# Altium PCB layout.PcbDoc (part 4 of 11)
Units mil, origin at the board's own origin, x right, y up, seen from the top; angles counter-clockwise.
Board outline 3543.31 x 3149.61 mil, 2 copper layers (Top Layer, Bottom Layer); 78 components, 73 nets, 327 pads, 143 vias.
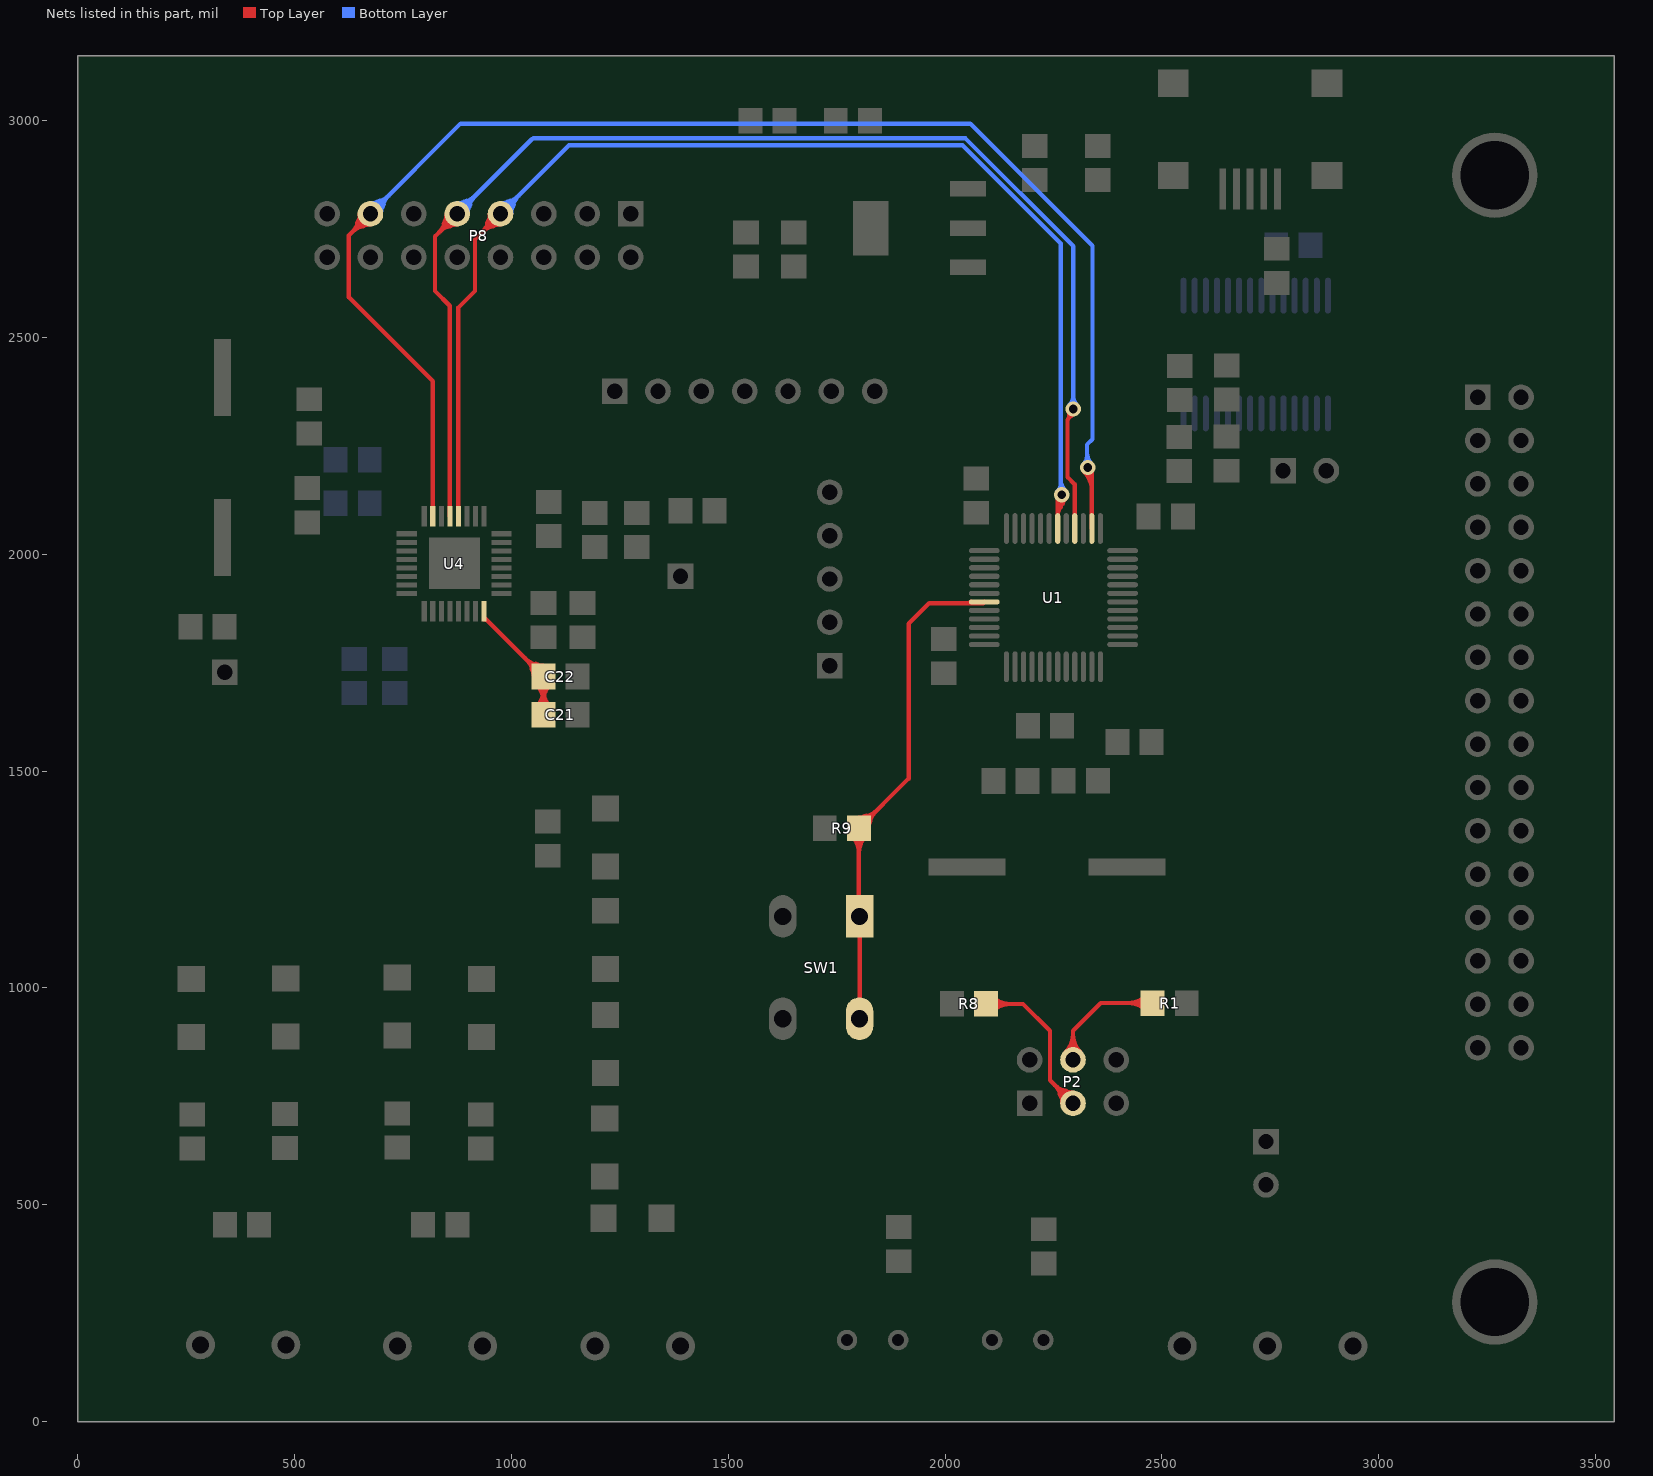
[diagram p4: the nets of this part, all layers, seen from the top]

## Via types
v1: diameter 35, hole 20, Top Layer to Bottom Layer, tented both sides, 113 vias
v2: diameter 35, hole 20, Top Layer to Bottom Layer, 28 vias
v3: diameter 35.43, hole 35.43, Top Layer to Bottom Layer, 2 vias

## Nets (pads, with @x,y where several pads share a name; then routed paths per layer and width w, separated by ;. In a path a pad name is that pad's centre, name@x,y a point inside that pad or via, vN(x,y) a via of type N, cw(c..) or ccw(c..) an arc to the next point about the centre after c; other vN are vias at no path point) (continued)
9153_MOSI: P8.9 U1.28 U4.29 | length 6515.8
  Top Layer w10: U4.29@858.13,2087.57 858.13,2572.87 824,2607 824,2733 875,2784 P8.9@875,2785 ; U1.28@2299.21,2059.45 2299.21,2161.16 2282.5,2177.87 2282.5,2310.5 ; v2@2303,2342.5 v2(2295.5,2335) 2295.5,2323.5 2282.5,2310.5 ; 832.42,2741.42 ccw(c788.84,2785) P8.9@850.47,2785 ; 832.42,2741.42 ccw(c788.84,2785) P8.9@850.47,2785 ; 832.42,2741.42 ccw(c788.84,2785) P8.9@850.47,2785 ; 832.42,2741.42 ccw(c788.84,2785) P8.9@850.47,2785 ; 832.42,2741.42 ccw(c788.84,2785) P8.9@850.47,2785 ; 834.84,2743.84 cw(c875,2703.67) P8.9@875,2760.47 ; 834.84,2743.84 cw(c875,2703.67) P8.9@875,2760.47 ; 834.84,2743.84 cw(c875,2703.67) P8.9@875,2760.47 ; 834.84,2743.84 cw(c875,2703.67) P8.9@875,2760.47 ; 834.84,2743.84 cw(c875,2703.67) P8.9@875,2760.47 ; 844.36,2762.2 cw(c882.24,2752.05) P8.9@873.83,2790.35 ; 844.36,2762.2 cw(c882.24,2752.05) P8.9@873.83,2790.35 ; 844.36,2762.2 cw(c882.24,2752.05) P8.9@873.83,2790.35 ; 844.36,2762.2 cw(c882.24,2752.05) P8.9@873.83,2790.35 ; 844.36,2762.2 cw(c882.24,2752.05) P8.9@873.83,2790.35 ; 844.36,2762.2 cw(c882.24,2752.05) P8.9@873.83,2790.35 ; 844.36,2762.2 cw(c882.24,2752.05) P8.9@873.83,2790.35 ; 844.36,2762.2 cw(c882.24,2752.05) P8.9@873.83,2790.35 ; 844.36,2762.2 cw(c882.24,2752.05) P8.9@873.83,2790.35 ; 844.36,2762.2 cw(c882.24,2752.05) P8.9@873.83,2790.35 ; 849.49,2758.49 ccw(c822.99,2785) P8.9@860.47,2785 ; 849.49,2758.49 ccw(c822.99,2785) P8.9@860.47,2785 ; 849.49,2758.49 ccw(c822.99,2785) P8.9@860.47,2785 ; 849.49,2758.49 ccw(c822.99,2785) P8.9@860.47,2785 ; 849.49,2758.49 ccw(c822.99,2785) P8.9@860.47,2785 ; 851.91,2760.91 cw(c875,2737.81) P8.9@875,2770.47 ; 851.91,2760.91 cw(c875,2737.81) P8.9@875,2770.47 ; 851.91,2760.91 cw(c875,2737.81) P8.9@875,2770.47 ; 851.91,2760.91 cw(c875,2737.81) P8.9@875,2770.47 ; 851.91,2760.91 cw(c875,2737.81) P8.9@875,2770.47 ; 853.11,2754.61 ccw(c843.36,2791) P8.9@880.38,2783.98 ; 853.11,2754.61 ccw(c843.36,2791) P8.9@880.38,2783.98 ; 853.11,2754.61 ccw(c843.36,2791) P8.9@880.38,2783.98 ; 853.11,2754.61 ccw(c843.36,2791) P8.9@880.38,2783.98 ; 853.11,2754.61 ccw(c843.36,2791) P8.9@880.38,2783.98 ; 853.11,2754.61 ccw(c843.36,2791) P8.9@880.38,2783.98 ; 853.11,2754.61 ccw(c843.36,2791) P8.9@880.38,2783.98 ; 853.11,2754.61 ccw(c843.36,2791) P8.9@880.38,2783.98 ; 853.11,2754.61 ccw(c843.36,2791) P8.9@880.38,2783.98 ; 853.11,2754.61 ccw(c843.36,2791) P8.9@880.38,2783.98 ; 2282.5,2310.5 ccw(c2272,2321) v2@2284.76,2328.6 ; 2282.5,2310.5 ccw(c2272,2321) v2@2284.76,2328.6 ; 2282.5,2310.5 ccw(c2272,2321) v2@2284.76,2328.6 ; 2282.5,2310.5 ccw(c2272,2321) v2@2284.76,2328.6 ; 2282.5,2310.5 ccw(c2272,2321) v2@2284.76,2328.6
  Bottom Layer w10: P8.9@875,2785 1047,2957 ; 1051,2959 2047.12,2959 2295.5,2710.62 v2(2295.5,2335) ; P8.9@869.64,2786.1 cw(c907.3,2778.39) 897.35,2815.52 ; P8.9@869.64,2786.1 cw(c907.3,2778.39) 897.35,2815.52 ; P8.9@869.64,2786.1 cw(c907.3,2778.39) 897.35,2815.52 ; P8.9@869.64,2786.1 cw(c907.3,2778.39) 897.35,2815.52 ; P8.9@869.64,2786.1 cw(c907.3,2778.39) 897.35,2815.52 ; P8.9@869.64,2786.1 cw(c907.3,2778.39) 897.35,2815.52 ; P8.9@869.64,2786.1 cw(c907.3,2778.39) 897.35,2815.52 ; P8.9@869.64,2786.1 cw(c907.3,2778.39) 897.35,2815.52 ; P8.9@869.64,2786.1 cw(c907.3,2778.39) 897.35,2815.52 ; P8.9@869.64,2786.1 cw(c907.3,2778.39) 897.35,2815.52 ; P8.9@875,2799.53 ccw(c875,2834.6) 899.8,2809.8 ; P8.9@875,2799.53 ccw(c875,2834.6) 899.8,2809.8 ; P8.9@875,2799.53 ccw(c875,2834.6) 899.8,2809.8 ; P8.9@875,2799.53 ccw(c875,2834.6) 899.8,2809.8 ; P8.9@875,2799.53 ccw(c875,2834.6) 899.8,2809.8 ; P8.9@875,2809.53 ccw(c875,2868.74) 916.87,2826.87 ; P8.9@875,2809.53 ccw(c875,2868.74) 916.87,2826.87 ; P8.9@875,2809.53 ccw(c875,2868.74) 916.87,2826.87 ; P8.9@875,2809.53 ccw(c875,2868.74) 916.87,2826.87 ; P8.9@875,2809.53 ccw(c875,2868.74) 916.87,2826.87 ; P8.9@876.1,2779.64 ccw(c868.39,2817.3) 905.52,2807.35 ; P8.9@876.1,2779.64 ccw(c868.39,2817.3) 905.52,2807.35 ; P8.9@876.1,2779.64 ccw(c868.39,2817.3) 905.52,2807.35 ; P8.9@876.1,2779.64 ccw(c868.39,2817.3) 905.52,2807.35 ; P8.9@876.1,2779.64 ccw(c868.39,2817.3) 905.52,2807.35 ; P8.9@876.1,2779.64 ccw(c868.39,2817.3) 905.52,2807.35 ; P8.9@876.1,2779.64 ccw(c868.39,2817.3) 905.52,2807.35 ; P8.9@876.1,2779.64 ccw(c868.39,2817.3) 905.52,2807.35 ; P8.9@876.1,2779.64 ccw(c868.39,2817.3) 905.52,2807.35 ; P8.9@876.1,2779.64 ccw(c868.39,2817.3) 905.52,2807.35 ; P8.9@889.53,2785 cw(c924.6,2785) 899.8,2809.8 ; P8.9@889.53,2785 cw(c924.6,2785) 899.8,2809.8 ; P8.9@889.53,2785 cw(c924.6,2785) 899.8,2809.8 ; P8.9@889.53,2785 cw(c924.6,2785) 899.8,2809.8 ; P8.9@889.53,2785 cw(c924.6,2785) 899.8,2809.8 ; P8.9@899.53,2785 cw(c958.74,2785) 916.87,2826.87 ; P8.9@899.53,2785 cw(c958.74,2785) 916.87,2826.87 ; P8.9@899.53,2785 cw(c958.74,2785) 916.87,2826.87 ; P8.9@899.53,2785 cw(c958.74,2785) 916.87,2826.87 ; P8.9@899.53,2785 cw(c958.74,2785) 916.87,2826.87 ; v2@2286.66,2343.84 ccw(c2265.32,2365.18) 2295.5,2365.18 ; v2@2286.66,2343.84 ccw(c2265.32,2365.18) 2295.5,2365.18 ; v2@2286.66,2343.84 ccw(c2265.32,2365.18) 2295.5,2365.18 ; v2@2286.66,2343.84 ccw(c2265.32,2365.18) 2295.5,2365.18 ; v2@2286.66,2343.84 ccw(c2265.32,2365.18) 2295.5,2365.18 ; 2295.5,2365.18 ccw(c2325.68,2365.18) v2@2304.34,2343.84 ; 2295.5,2365.18 ccw(c2325.68,2365.18) v2@2304.34,2343.84 ; 2295.5,2365.18 ccw(c2325.68,2365.18) v2@2304.34,2343.84 ; 2295.5,2365.18 ccw(c2325.68,2365.18) v2@2304.34,2343.84 ; 2295.5,2365.18 ccw(c2325.68,2365.18) v2@2304.34,2343.84
9153_RSTB: P8.7 U1.30 U4.28 | length 7275.5
  Top Layer w10: U4.28@877.82,2087.57 877.82,2568.82 916,2607 916,2726 P8.7@975,2785 ; U1.30@2259.84,2059.45 2259.84,2127.84 v2(2269,2137) ; 933.13,2743.13 cw(c975,2701.26) P8.7@975,2760.47 ; 933.13,2743.13 ccw(c891.26,2785) P8.7@950.47,2785 ; 933.13,2743.13 cw(c975,2701.26) P8.7@975,2760.47 ; 933.13,2743.13 ccw(c891.26,2785) P8.7@950.47,2785 ; 933.13,2743.13 cw(c975,2701.26) P8.7@975,2760.47 ; 933.13,2743.13 ccw(c891.26,2785) P8.7@950.47,2785 ; 933.13,2743.13 cw(c975,2701.26) P8.7@975,2760.47 ; 933.13,2743.13 ccw(c891.26,2785) P8.7@950.47,2785 ; 933.13,2743.13 cw(c975,2701.26) P8.7@975,2760.47 ; 933.13,2743.13 ccw(c891.26,2785) P8.7@950.47,2785 ; 944.48,2762.65 cw(c981.61,2752.7) P8.7@973.9,2790.36 ; 944.48,2762.65 cw(c981.61,2752.7) P8.7@973.9,2790.36 ; 944.48,2762.65 cw(c981.61,2752.7) P8.7@973.9,2790.36 ; 944.48,2762.65 cw(c981.61,2752.7) P8.7@973.9,2790.36 ; 944.48,2762.65 cw(c981.61,2752.7) P8.7@973.9,2790.36 ; 944.48,2762.65 cw(c981.61,2752.7) P8.7@973.9,2790.36 ; 944.48,2762.65 cw(c981.61,2752.7) P8.7@973.9,2790.36 ; 944.48,2762.65 cw(c981.61,2752.7) P8.7@973.9,2790.36 ; 944.48,2762.65 cw(c981.61,2752.7) P8.7@973.9,2790.36 ; 944.48,2762.65 cw(c981.61,2752.7) P8.7@973.9,2790.36 ; 950.2,2760.2 cw(c975,2735.4) P8.7@975,2770.47 ; 950.2,2760.2 ccw(c925.4,2785) P8.7@960.47,2785 ; 950.2,2760.2 cw(c975,2735.4) P8.7@975,2770.47 ; 950.2,2760.2 ccw(c925.4,2785) P8.7@960.47,2785 ; 950.2,2760.2 cw(c975,2735.4) P8.7@975,2770.47 ; 950.2,2760.2 ccw(c925.4,2785) P8.7@960.47,2785 ; 950.2,2760.2 cw(c975,2735.4) P8.7@975,2770.47 ; 950.2,2760.2 ccw(c925.4,2785) P8.7@960.47,2785 ; 950.2,2760.2 cw(c975,2735.4) P8.7@975,2770.47 ; 950.2,2760.2 ccw(c925.4,2785) P8.7@960.47,2785 ; 952.65,2754.48 ccw(c942.7,2791.61) P8.7@980.36,2783.9 ; 952.65,2754.48 ccw(c942.7,2791.61) P8.7@980.36,2783.9 ; 952.65,2754.48 ccw(c942.7,2791.61) P8.7@980.36,2783.9 ; 952.65,2754.48 ccw(c942.7,2791.61) P8.7@980.36,2783.9 ; 952.65,2754.48 ccw(c942.7,2791.61) P8.7@980.36,2783.9 ; 952.65,2754.48 ccw(c942.7,2791.61) P8.7@980.36,2783.9 ; 952.65,2754.48 ccw(c942.7,2791.61) P8.7@980.36,2783.9 ; 952.65,2754.48 ccw(c942.7,2791.61) P8.7@980.36,2783.9 ; 952.65,2754.48 ccw(c942.7,2791.61) P8.7@980.36,2783.9 ; 952.65,2754.48 ccw(c942.7,2791.61) P8.7@980.36,2783.9 ; U1.30@2259.84,2084.71 cw(c2321.29,2084.71) v2@2277.84,2128.16 ; U1.30@2259.84,2084.71 cw(c2321.29,2084.71) v2@2277.84,2128.16 ; U1.30@2259.84,2084.71 cw(c2321.29,2084.71) v2@2277.84,2128.16 ; U1.30@2259.84,2084.71 cw(c2321.29,2084.71) v2@2277.84,2128.16 ; U1.30@2259.84,2084.71 cw(c2321.29,2084.71) v2@2277.84,2128.16 ; 2259.84,2108.86 cw(c2297.14,2108.86) v2@2270.77,2135.23 ; 2259.84,2108.86 cw(c2297.14,2108.86) v2@2270.77,2135.23 ; 2259.84,2108.86 cw(c2297.14,2108.86) v2@2270.77,2135.23 ; 2259.84,2108.86 cw(c2297.14,2108.86) v2@2270.77,2135.23 ; 2259.84,2108.86 cw(c2297.14,2108.86) v2@2270.77,2135.23 ; v2@2260.57,2127.77 cw(c2256.17,2122.97) 2261.81,2119.72 ; v2@2260.57,2127.77 cw(c2256.17,2122.97) 2261.81,2119.72 ; v2@2260.57,2127.77 cw(c2256.17,2122.97) 2261.81,2119.72 ; v2@2260.57,2127.77 cw(c2256.17,2122.97) 2261.81,2119.72 ; v2@2260.57,2127.77 cw(c2256.17,2122.97) 2261.81,2119.72 ; v2@2260.57,2127.77 cw(c2256.17,2122.97) 2261.81,2119.72 ; v2@2260.57,2127.77 cw(c2256.17,2122.97) 2261.81,2119.72 ; v2@2260.57,2127.77 cw(c2256.17,2122.97) 2261.81,2119.72 ; v2@2260.57,2127.77 cw(c2256.17,2122.97) 2261.81,2119.72 ; v2@2260.57,2127.77 cw(c2256.17,2122.97) 2261.81,2119.72 ; v2@2261.37,2127.1 cw(c2251.72,2114.56) 2265.42,2106.65 ; v2@2261.37,2127.1 cw(c2251.72,2114.56) 2265.42,2106.65 ; v2@2261.37,2127.1 cw(c2251.72,2114.56) 2265.42,2106.65 ; v2@2261.37,2127.1 cw(c2251.72,2114.56) 2265.42,2106.65 ; v2@2261.37,2127.1 cw(c2251.72,2114.56) 2265.42,2106.65 ; v2@2261.37,2127.1 cw(c2251.72,2114.56) 2265.42,2106.65 ; v2@2261.37,2127.1 cw(c2251.72,2114.56) 2265.42,2106.65 ; v2@2261.37,2127.1 cw(c2251.72,2114.56) 2265.42,2106.65 ; v2@2261.37,2127.1 cw(c2251.72,2114.56) 2265.42,2106.65 ; v2@2261.37,2127.1 cw(c2251.72,2114.56) 2265.42,2106.65 ; 2261.81,2119.72 cw(c2270.14,2114.91) v2@2269.65,2124.52 ; 2261.81,2119.72 cw(c2270.14,2114.91) v2@2269.65,2124.52 ; 2261.81,2119.72 cw(c2270.14,2114.91) v2@2269.65,2124.52 ; 2261.81,2119.72 cw(c2270.14,2114.91) v2@2269.65,2124.52 ; 2261.81,2119.72 cw(c2270.14,2114.91) v2@2269.65,2124.52 ; 2261.81,2119.72 cw(c2270.14,2114.91) v2@2269.65,2124.52 ; 2261.81,2119.72 cw(c2270.14,2114.91) v2@2269.65,2124.52 ; 2261.81,2119.72 cw(c2270.14,2114.91) v2@2269.65,2124.52 ; 2261.81,2119.72 cw(c2270.14,2114.91) v2@2269.65,2124.52 ; 2261.81,2119.72 cw(c2270.14,2114.91) v2@2269.65,2124.52 ; v2@2267.47,2135.02 cw(c2258.75,2123.69) 2271.13,2116.55 ; v2@2267.47,2135.02 cw(c2258.75,2123.69) 2271.13,2116.55 ; v2@2267.47,2135.02 cw(c2258.75,2123.69) 2271.13,2116.55 ; v2@2267.47,2135.02 cw(c2258.75,2123.69) 2271.13,2116.55 ; v2@2267.47,2135.02 cw(c2258.75,2123.69) 2271.13,2116.55 ; v2@2267.47,2135.02 cw(c2258.75,2123.69) 2271.13,2116.55 ; v2@2267.47,2135.02 cw(c2258.75,2123.69) 2271.13,2116.55 ; v2@2267.47,2135.02 cw(c2258.75,2123.69) 2271.13,2116.55 ; v2@2267.47,2135.02 cw(c2258.75,2123.69) 2271.13,2116.55 ; v2@2267.47,2135.02 cw(c2258.75,2123.69) 2271.13,2116.55
  Bottom Layer w10: P8.7@975,2785 1133,2943 2040.49,2943 2267,2716.49 2267,2139 v2(2269,2137) ; P8.7@969.64,2786.1 cw(c1007.3,2778.39) 997.35,2815.52 ; P8.7@969.64,2786.1 cw(c1007.3,2778.39) 997.35,2815.52 ; P8.7@969.64,2786.1 cw(c1007.3,2778.39) 997.35,2815.52 ; P8.7@969.64,2786.1 cw(c1007.3,2778.39) 997.35,2815.52 ; P8.7@969.64,2786.1 cw(c1007.3,2778.39) 997.35,2815.52 ; P8.7@969.64,2786.1 cw(c1007.3,2778.39) 997.35,2815.52 ; P8.7@969.64,2786.1 cw(c1007.3,2778.39) 997.35,2815.52 ; P8.7@969.64,2786.1 cw(c1007.3,2778.39) 997.35,2815.52 ; P8.7@969.64,2786.1 cw(c1007.3,2778.39) 997.35,2815.52 ; P8.7@969.64,2786.1 cw(c1007.3,2778.39) 997.35,2815.52 ; P8.7@975,2799.53 ccw(c975,2834.6) 999.8,2809.8 ; P8.7@975,2799.53 ccw(c975,2834.6) 999.8,2809.8 ; P8.7@975,2799.53 ccw(c975,2834.6) 999.8,2809.8 ; P8.7@975,2799.53 ccw(c975,2834.6) 999.8,2809.8 ; P8.7@975,2799.53 ccw(c975,2834.6) 999.8,2809.8 ; P8.7@975,2809.53 ccw(c975,2868.74) 1016.87,2826.87 ; P8.7@975,2809.53 ccw(c975,2868.74) 1016.87,2826.87 ; P8.7@975,2809.53 ccw(c975,2868.74) 1016.87,2826.87 ; P8.7@975,2809.53 ccw(c975,2868.74) 1016.87,2826.87 ; P8.7@975,2809.53 ccw(c975,2868.74) 1016.87,2826.87 ; P8.7@976.1,2779.64 ccw(c968.39,2817.3) 1005.52,2807.35 ; P8.7@976.1,2779.64 ccw(c968.39,2817.3) 1005.52,2807.35 ; P8.7@976.1,2779.64 ccw(c968.39,2817.3) 1005.52,2807.35 ; P8.7@976.1,2779.64 ccw(c968.39,2817.3) 1005.52,2807.35 ; P8.7@976.1,2779.64 ccw(c968.39,2817.3) 1005.52,2807.35 ; P8.7@976.1,2779.64 ccw(c968.39,2817.3) 1005.52,2807.35 ; P8.7@976.1,2779.64 ccw(c968.39,2817.3) 1005.52,2807.35 ; P8.7@976.1,2779.64 ccw(c968.39,2817.3) 1005.52,2807.35 ; P8.7@976.1,2779.64 ccw(c968.39,2817.3) 1005.52,2807.35 ; P8.7@976.1,2779.64 ccw(c968.39,2817.3) 1005.52,2807.35 ; P8.7@989.53,2785 cw(c1024.6,2785) 999.8,2809.8 ; P8.7@989.53,2785 cw(c1024.6,2785) 999.8,2809.8 ; P8.7@989.53,2785 cw(c1024.6,2785) 999.8,2809.8 ; P8.7@989.53,2785 cw(c1024.6,2785) 999.8,2809.8 ; P8.7@989.53,2785 cw(c1024.6,2785) 999.8,2809.8 ; P8.7@999.53,2785 cw(c1058.74,2785) 1016.87,2826.87 ; P8.7@999.53,2785 cw(c1058.74,2785) 1016.87,2826.87 ; P8.7@999.53,2785 cw(c1058.74,2785) 1016.87,2826.87 ; P8.7@999.53,2785 cw(c1058.74,2785) 1016.87,2826.87 ; P8.7@999.53,2785 cw(c1058.74,2785) 1016.87,2826.87 ; v2@2260.16,2145.84 ccw(c2243.65,2162.35) 2267,2162.35 ; v2@2260.16,2145.84 ccw(c2243.65,2162.35) 2267,2162.35 ; v2@2260.16,2145.84 ccw(c2243.65,2162.35) 2267,2162.35 ; v2@2260.16,2145.84 ccw(c2243.65,2162.35) 2267,2162.35 ; v2@2260.16,2145.84 ccw(c2243.65,2162.35) 2267,2162.35 ; 2267,2172.01 ccw(c2304.01,2172.01) v2@2277.84,2145.84 ; 2267,2172.01 ccw(c2304.01,2172.01) v2@2277.84,2145.84 ; 2267,2172.01 ccw(c2304.01,2172.01) v2@2277.84,2145.84 ; 2267,2172.01 ccw(c2304.01,2172.01) v2@2277.84,2145.84 ; 2267,2172.01 ccw(c2304.01,2172.01) v2@2277.84,2145.84
9153_SCLK: P8.13 U1.26 U4.31 | length 7351.5
  Top Layer w10: P8.13@675,2785 625,2735 625,2593 818.76,2399.24 U4.31@818.76,2087.57 ; v2(2329,2200) 2338.58,2190.42 U1.26@2338.58,2059.45 ; 633.13,2743.13 cw(c675,2701.26) P8.13@675,2760.47 ; 633.13,2743.13 ccw(c591.26,2785) P8.13@650.47,2785 ; 633.13,2743.13 cw(c675,2701.26) P8.13@675,2760.47 ; 633.13,2743.13 ccw(c591.26,2785) P8.13@650.47,2785 ; 633.13,2743.13 cw(c675,2701.26) P8.13@675,2760.47 ; 633.13,2743.13 ccw(c591.26,2785) P8.13@650.47,2785 ; 633.13,2743.13 cw(c675,2701.26) P8.13@675,2760.47 ; 633.13,2743.13 ccw(c591.26,2785) P8.13@650.47,2785 ; 633.13,2743.13 cw(c675,2701.26) P8.13@675,2760.47 ; 633.13,2743.13 ccw(c591.26,2785) P8.13@650.47,2785 ; 644.48,2762.65 cw(c681.61,2752.7) P8.13@673.9,2790.36 ; 644.48,2762.65 cw(c681.61,2752.7) P8.13@673.9,2790.36 ; 644.48,2762.65 cw(c681.61,2752.7) P8.13@673.9,2790.36 ; 644.48,2762.65 cw(c681.61,2752.7) P8.13@673.9,2790.36 ; 644.48,2762.65 cw(c681.61,2752.7) P8.13@673.9,2790.36 ; 644.48,2762.65 cw(c681.61,2752.7) P8.13@673.9,2790.36 ; 644.48,2762.65 cw(c681.61,2752.7) P8.13@673.9,2790.36 ; 644.48,2762.65 cw(c681.61,2752.7) P8.13@673.9,2790.36 ; 644.48,2762.65 cw(c681.61,2752.7) P8.13@673.9,2790.36 ; 644.48,2762.65 cw(c681.61,2752.7) P8.13@673.9,2790.36 ; 650.2,2760.2 cw(c675,2735.4) P8.13@675,2770.47 ; 650.2,2760.2 ccw(c625.4,2785) P8.13@660.47,2785 ; 650.2,2760.2 cw(c675,2735.4) P8.13@675,2770.47 ; 650.2,2760.2 ccw(c625.4,2785) P8.13@660.47,2785 ; 650.2,2760.2 cw(c675,2735.4) P8.13@675,2770.47 ; 650.2,2760.2 ccw(c625.4,2785) P8.13@660.47,2785 ; 650.2,2760.2 cw(c675,2735.4) P8.13@675,2770.47 ; 650.2,2760.2 ccw(c625.4,2785) P8.13@660.47,2785 ; 650.2,2760.2 cw(c675,2735.4) P8.13@675,2770.47 ; 650.2,2760.2 ccw(c625.4,2785) P8.13@660.47,2785 ; 652.65,2754.48 ccw(c642.7,2791.61) P8.13@680.36,2783.9 ; 652.65,2754.48 ccw(c642.7,2791.61) P8.13@680.36,2783.9 ; 652.65,2754.48 ccw(c642.7,2791.61) P8.13@680.36,2783.9 ; 652.65,2754.48 ccw(c642.7,2791.61) P8.13@680.36,2783.9 ; 652.65,2754.48 ccw(c642.7,2791.61) P8.13@680.36,2783.9 ; 652.65,2754.48 ccw(c642.7,2791.61) P8.13@680.36,2783.9 ; 652.65,2754.48 ccw(c642.7,2791.61) P8.13@680.36,2783.9 ; 652.65,2754.48 ccw(c642.7,2791.61) P8.13@680.36,2783.9 ; 652.65,2754.48 ccw(c642.7,2791.61) P8.13@680.36,2783.9 ; 652.65,2754.48 ccw(c642.7,2791.61) P8.13@680.36,2783.9 ; v2@2320.16,2191.16 cw(c2275.69,2146.69) 2338.58,2146.69 ; v2@2320.16,2191.16 cw(c2275.69,2146.69) 2338.58,2146.69 ; v2@2320.16,2191.16 cw(c2275.69,2146.69) 2338.58,2146.69 ; v2@2320.16,2191.16 cw(c2275.69,2146.69) 2338.58,2146.69 ; v2@2320.16,2191.16 cw(c2275.69,2146.69) 2338.58,2146.69 ; v2@2327.23,2198.23 cw(c2299.83,2170.83) 2338.58,2170.83 ; v2@2327.23,2198.23 cw(c2299.83,2170.83) 2338.58,2170.83 ; v2@2327.23,2198.23 cw(c2299.83,2170.83) 2338.58,2170.83 ; v2@2327.23,2198.23 cw(c2299.83,2170.83) 2338.58,2170.83 ; v2@2327.23,2198.23 cw(c2299.83,2170.83) 2338.58,2170.83 ; v2@2327.94,2187.54 cw(c2327.01,2176.55) 2336.56,2182.07 ; v2@2327.94,2187.54 cw(c2327.01,2176.55) 2336.56,2182.07 ; v2@2327.94,2187.54 cw(c2327.01,2176.55) 2336.56,2182.07 ; v2@2327.94,2187.54 cw(c2327.01,2176.55) 2336.56,2182.07 ; v2@2327.94,2187.54 cw(c2327.01,2176.55) 2336.56,2182.07 ; v2@2327.94,2187.54 cw(c2327.01,2176.55) 2336.56,2182.07 ; v2@2327.94,2187.54 cw(c2327.01,2176.55) 2336.56,2182.07 ; v2@2327.94,2187.54 cw(c2327.01,2176.55) 2336.56,2182.07 ; v2@2327.94,2187.54 cw(c2327.01,2176.55) 2336.56,2182.07 ; v2@2327.94,2187.54 cw(c2327.01,2176.55) 2336.56,2182.07 ; 2336.56,2182.07 cw(c2343.02,2185.8) v2@2337.78,2191.11 ; 2336.56,2182.07 cw(c2343.02,2185.8) v2@2337.78,2191.11 ; 2336.56,2182.07 cw(c2343.02,2185.8) v2@2337.78,2191.11 ; 2336.56,2182.07 cw(c2343.02,2185.8) v2@2337.78,2191.11 ; 2336.56,2182.07 cw(c2343.02,2185.8) v2@2337.78,2191.11 ; 2336.56,2182.07 cw(c2343.02,2185.8) v2@2337.78,2191.11 ; 2336.56,2182.07 cw(c2343.02,2185.8) v2@2337.78,2191.11 ; 2336.56,2182.07 cw(c2343.02,2185.8) v2@2337.78,2191.11 ; 2336.56,2182.07 cw(c2343.02,2185.8) v2@2337.78,2191.11 ; 2336.56,2182.07 cw(c2343.02,2185.8) v2@2337.78,2191.11
  Bottom Layer w10: P8.13@675,2785 883,2993 2058.37,2993 2340,2711.37 2340,2265.3 2327.5,2252.8 2327.5,2201.5 v2(2329,2200) ; P8.13@669.64,2786.1 cw(c707.3,2778.39) 697.35,2815.52 ; P8.13@669.64,2786.1 cw(c707.3,2778.39) 697.35,2815.52 ; P8.13@669.64,2786.1 cw(c707.3,2778.39) 697.35,2815.52 ; P8.13@669.64,2786.1 cw(c707.3,2778.39) 697.35,2815.52 ; P8.13@669.64,2786.1 cw(c707.3,2778.39) 697.35,2815.52 ; P8.13@669.64,2786.1 cw(c707.3,2778.39) 697.35,2815.52 ; P8.13@669.64,2786.1 cw(c707.3,2778.39) 697.35,2815.52 ; P8.13@669.64,2786.1 cw(c707.3,2778.39) 697.35,2815.52 ; P8.13@669.64,2786.1 cw(c707.3,2778.39) 697.35,2815.52 ; P8.13@669.64,2786.1 cw(c707.3,2778.39) 697.35,2815.52 ; P8.13@675,2799.53 ccw(c675,2834.6) 699.8,2809.8 ; P8.13@675,2799.53 ccw(c675,2834.6) 699.8,2809.8 ; P8.13@675,2799.53 ccw(c675,2834.6) 699.8,2809.8 ; P8.13@675,2799.53 ccw(c675,2834.6) 699.8,2809.8 ; P8.13@675,2799.53 ccw(c675,2834.6) 699.8,2809.8 ; P8.13@675,2809.53 ccw(c675,2868.74) 716.87,2826.87 ; P8.13@675,2809.53 ccw(c675,2868.74) 716.87,2826.87 ; P8.13@675,2809.53 ccw(c675,2868.74) 716.87,2826.87 ; P8.13@675,2809.53 ccw(c675,2868.74) 716.87,2826.87 ; P8.13@675,2809.53 ccw(c675,2868.74) 716.87,2826.87 ; P8.13@676.1,2779.64 ccw(c668.39,2817.3) 705.52,2807.35 ; P8.13@676.1,2779.64 ccw(c668.39,2817.3) 705.52,2807.35 ; P8.13@676.1,2779.64 ccw(c668.39,2817.3) 705.52,2807.35 ; P8.13@676.1,2779.64 ccw(c668.39,2817.3) 705.52,2807.35 ; P8.13@676.1,2779.64 ccw(c668.39,2817.3) 705.52,2807.35 ; P8.13@676.1,2779.64 ccw(c668.39,2817.3) 705.52,2807.35 ; P8.13@676.1,2779.64 ccw(c668.39,2817.3) 705.52,2807.35 ; P8.13@676.1,2779.64 ccw(c668.39,2817.3) 705.52,2807.35 ; P8.13@676.1,2779.64 ccw(c668.39,2817.3) 705.52,2807.35 ; P8.13@676.1,2779.64 ccw(c668.39,2817.3) 705.52,2807.35 ; P8.13@689.53,2785 cw(c724.6,2785) 699.8,2809.8 ; P8.13@689.53,2785 cw(c724.6,2785) 699.8,2809.8 ; P8.13@689.53,2785 cw(c724.6,2785) 699.8,2809.8 ; P8.13@689.53,2785 cw(c724.6,2785) 699.8,2809.8 ; P8.13@689.53,2785 cw(c724.6,2785) 699.8,2809.8 ; P8.13@699.53,2785 cw(c758.74,2785) 716.87,2826.87 ; P8.13@699.53,2785 cw(c758.74,2785) 716.87,2826.87 ; P8.13@699.53,2785 cw(c758.74,2785) 716.87,2826.87 ; P8.13@699.53,2785 cw(c758.74,2785) 716.87,2826.87 ; P8.13@699.53,2785 cw(c758.74,2785) 716.87,2826.87 ; v2@2320.16,2208.84 ccw(c2302.44,2226.56) 2327.5,2226.56 ; v2@2320.16,2208.84 ccw(c2302.44,2226.56) 2327.5,2226.56 ; v2@2320.16,2208.84 ccw(c2302.44,2226.56) 2327.5,2226.56 ; v2@2320.16,2208.84 ccw(c2302.44,2226.56) 2327.5,2226.56 ; v2@2320.16,2208.84 ccw(c2302.44,2226.56) 2327.5,2226.56 ; 2327.5,2233.8 ccw(c2362.8,2233.8) v2@2337.84,2208.84 ; 2327.5,2233.8 ccw(c2362.8,2233.8) v2@2337.84,2208.84 ; 2327.5,2233.8 ccw(c2362.8,2233.8) v2@2337.84,2208.84 ; 2327.5,2233.8 ccw(c2362.8,2233.8) v2@2337.84,2208.84 ; 2327.5,2233.8 ccw(c2362.8,2233.8) v2@2337.84,2208.84
AVDDOUT: C21.1 C22.1 U4.16 | length 3444.6
  Top Layer w10: U4.16@936.87,1869.06 936.87,1854.76 C22.1@1073.63,1718 C21.1@1073.63,1630 ; U4.16@936.87,1850.44 cw(c936.87,1840.02) 944.24,1847.39 ; U4.16@936.87,1850.44 cw(c936.87,1840.02) 944.24,1847.39 ; U4.16@936.87,1850.44 cw(c936.87,1840.02) 944.24,1847.39 ; U4.16@936.87,1850.44 cw(c936.87,1840.02) 944.24,1847.39 ; U4.16@936.87,1850.44 cw(c936.87,1840.02) 944.24,1847.39 ; 1031.76,1759.87 ccw(c1073.63,1801.74) C22.1@1073.63,1742.53 ; 1031.76,1759.87 ccw(c1073.63,1801.74) C22.1@1073.63,1742.53 ; 1031.76,1759.87 ccw(c1073.63,1801.74) C22.1@1073.63,1742.53 ; 1031.76,1759.87 ccw(c1073.63,1801.74) C22.1@1073.63,1742.53 ; 1031.76,1759.87 ccw(c1073.63,1801.74) C22.1@1073.63,1742.53 ; 1036.51,1755.12 cw(c1001.36,1719.97) C22.1@1051.07,1719.97 ; 1036.51,1755.12 cw(c1001.36,1719.97) C22.1@1051.07,1719.97 ; 1036.51,1755.12 cw(c1001.36,1719.97) C22.1@1051.07,1719.97 ; 1036.51,1755.12 cw(c1001.36,1719.97) C22.1@1051.07,1719.97 ; 1036.51,1755.12 cw(c1001.36,1719.97) C22.1@1051.07,1719.97 ; 1039.9,1751.56 cw(c1028.59,1709.33) C22.1@1071.14,1719.38 ; 1039.9,1751.56 cw(c1028.59,1709.33) C22.1@1071.14,1719.38 ; 1039.9,1751.56 cw(c1028.59,1709.33) C22.1@1071.14,1719.38 ; 1039.9,1751.56 cw(c1028.59,1709.33) C22.1@1071.14,1719.38 ; 1039.9,1751.56 cw(c1028.59,1709.33) C22.1@1071.14,1719.38 ; 1039.9,1751.56 cw(c1028.59,1709.33) C22.1@1071.14,1719.38 ; 1039.9,1751.56 cw(c1028.59,1709.33) C22.1@1071.14,1719.38 ; 1039.9,1751.56 cw(c1028.59,1709.33) C22.1@1071.14,1719.38 ; 1039.9,1751.56 cw(c1028.59,1709.33) C22.1@1071.14,1719.38 ; 1039.9,1751.56 cw(c1028.59,1709.33) C22.1@1071.14,1719.38 ; C22.1@1046.78,1735.99 ccw(c1077.82,1744.31) C22.1@1072.37,1712.64 ; C22.1@1046.78,1735.99 ccw(c1077.82,1744.31) C22.1@1072.37,1712.64 ; C22.1@1046.78,1735.99 ccw(c1077.82,1744.31) C22.1@1072.37,1712.64 ; C22.1@1046.78,1735.99 ccw(c1077.82,1744.31) C22.1@1072.37,1712.64 ; C22.1@1046.78,1735.99 ccw(c1077.82,1744.31) C22.1@1072.37,1712.64 ; C22.1@1046.78,1735.99 ccw(c1077.82,1744.31) C22.1@1072.37,1712.64 ; C22.1@1046.78,1735.99 ccw(c1077.82,1744.31) C22.1@1072.37,1712.64 ; C22.1@1046.78,1735.99 ccw(c1077.82,1744.31) C22.1@1072.37,1712.64 ; C22.1@1046.78,1735.99 ccw(c1077.82,1744.31) C22.1@1072.37,1712.64 ; C22.1@1046.78,1735.99 ccw(c1077.82,1744.31) C22.1@1072.37,1712.64 ; C22.1@1048.83,1742.8 ccw(c1073.63,1767.6) C22.1@1073.63,1732.53 ; C22.1@1048.83,1742.8 ccw(c1073.63,1767.6) C22.1@1073.63,1732.53 ; C22.1@1048.83,1742.8 ccw(c1073.63,1767.6) C22.1@1073.63,1732.53 ; C22.1@1048.83,1742.8 ccw(c1073.63,1767.6) C22.1@1073.63,1732.53 ; C22.1@1048.83,1742.8 ccw(c1073.63,1767.6) C22.1@1073.63,1732.53 ; C22.1@1056.07,1747.23 cw(c1047.09,1713.7) C22.1@1080.87,1721.68 ; C22.1@1056.07,1747.23 cw(c1047.09,1713.7) C22.1@1080.87,1721.68 ; C22.1@1056.07,1747.23 cw(c1047.09,1713.7) C22.1@1080.87,1721.68 ; C22.1@1056.07,1747.23 cw(c1047.09,1713.7) C22.1@1080.87,1721.68 ; C22.1@1056.07,1747.23 cw(c1047.09,1713.7) C22.1@1080.87,1721.68 ; C22.1@1056.07,1747.23 cw(c1047.09,1713.7) C22.1@1080.87,1721.68 ; C22.1@1056.07,1747.23 cw(c1047.09,1713.7) C22.1@1080.87,1721.68 ; C22.1@1056.07,1747.23 cw(c1047.09,1713.7) C22.1@1080.87,1721.68 ; C22.1@1056.07,1747.23 cw(c1047.09,1713.7) C22.1@1080.87,1721.68 ; C22.1@1056.07,1747.23 cw(c1047.09,1713.7) C22.1@1080.87,1721.68 ; C21.1@1057.68,1647.92 ccw(c1019.17,1686.43) 1073.63,1686.43 ; C21.1@1057.68,1647.92 ccw(c1019.17,1686.43) 1073.63,1686.43 ; C21.1@1057.68,1647.92 ccw(c1019.17,1686.43) 1073.63,1686.43 ; C21.1@1057.68,1647.92 ccw(c1019.17,1686.43) 1073.63,1686.43 ; C21.1@1057.68,1647.92 ccw(c1019.17,1686.43) 1073.63,1686.43 ; C22.1@1057.68,1700.08 cw(c1019.17,1661.57) 1073.63,1661.57 ; C22.1@1057.68,1700.08 cw(c1019.17,1661.57) 1073.63,1661.57 ; C22.1@1057.68,1700.08 cw(c1019.17,1661.57) 1073.63,1661.57 ; C22.1@1057.68,1700.08 cw(c1019.17,1661.57) 1073.63,1661.57 ; C22.1@1057.68,1700.08 cw(c1019.17,1661.57) 1073.63,1661.57 ; C21.1@1064.75,1640.85 ccw(c1043.31,1662.29) 1073.63,1662.29 ; C21.1@1064.75,1640.85 ccw(c1043.31,1662.29) 1073.63,1662.29 ; C21.1@1064.75,1640.85 ccw(c1043.31,1662.29) 1073.63,1662.29 ; C21.1@1064.75,1640.85 ccw(c1043.31,1662.29) 1073.63,1662.29 ; C21.1@1064.75,1640.85 ccw(c1043.31,1662.29) 1073.63,1662.29 ; C22.1@1064.75,1707.15 cw(c1043.31,1685.71) 1073.63,1685.71 ; C22.1@1064.75,1707.15 cw(c1043.31,1685.71) 1073.63,1685.71 ; C22.1@1064.75,1707.15 cw(c1043.31,1685.71) 1073.63,1685.71 ; C22.1@1064.75,1707.15 cw(c1043.31,1685.71) 1073.63,1685.71 ; C22.1@1064.75,1707.15 cw(c1043.31,1685.71) 1073.63,1685.71 ; 1073.63,1661.57 cw(c1128.09,1661.57) C22.1@1089.58,1700.08 ; 1073.63,1661.57 cw(c1128.09,1661.57) C22.1@1089.58,1700.08 ; 1073.63,1661.57 cw(c1128.09,1661.57) C22.1@1089.58,1700.08 ; 1073.63,1661.57 cw(c1128.09,1661.57) C22.1@1089.58,1700.08 ; 1073.63,1661.57 cw(c1128.09,1661.57) C22.1@1089.58,1700.08 ; 1073.63,1662.29 ccw(c1103.95,1662.29) C21.1@1082.51,1640.85 ; 1073.63,1662.29 ccw(c1103.95,1662.29) C21.1@1082.51,1640.85 ; 1073.63,1662.29 ccw(c1103.95,1662.29) C21.1@1082.51,1640.85 ; 1073.63,1662.29 ccw(c1103.95,1662.29) C21.1@1082.51,1640.85 ; 1073.63,1662.29 ccw(c1103.95,1662.29) C21.1@1082.51,1640.85 ; 1073.63,1685.71 cw(c1103.95,1685.71) C22.1@1082.51,1707.15 ; 1073.63,1685.71 cw(c1103.95,1685.71) C22.1@1082.51,1707.15 ; 1073.63,1685.71 cw(c1103.95,1685.71) C22.1@1082.51,1707.15 ; 1073.63,1685.71 cw(c1103.95,1685.71) C22.1@1082.51,1707.15 ; 1073.63,1685.71 cw(c1103.95,1685.71) C22.1@1082.51,1707.15 ; 1073.63,1686.43 ccw(c1128.09,1686.43) C21.1@1089.58,1647.92 ; 1073.63,1686.43 ccw(c1128.09,1686.43) C21.1@1089.58,1647.92 ; 1073.63,1686.43 ccw(c1128.09,1686.43) C21.1@1089.58,1647.92 ; 1073.63,1686.43 ccw(c1128.09,1686.43) C21.1@1089.58,1647.92 ; 1073.63,1686.43 ccw(c1128.09,1686.43) C21.1@1089.58,1647.92
BOOT0: P2.3 R8.1 | length 2619.7
  Top Layer w10: R8.1@2094.37,963 2180,963 2242,901 2242,787 P2.3@2295,734 ; R8.1@2103.25,954.12 cw(c2124.69,932.68) 2124.69,963 ; R8.1@2103.25,954.12 cw(c2124.69,932.68) 2124.69,963 ; R8.1@2103.25,954.12 cw(c2124.69,932.68) 2124.69,963 ; R8.1@2103.25,954.12 cw(c2124.69,932.68) 2124.69,963 ; R8.1@2103.25,954.12 cw(c2124.69,932.68) 2124.69,963 ; R8.1@2103.25,971.88 ccw(c2124.69,993.32) 2124.69,963 ; R8.1@2103.25,971.88 ccw(c2124.69,993.32) 2124.69,963 ; R8.1@2103.25,971.88 ccw(c2124.69,993.32) 2124.69,963 ; R8.1@2103.25,971.88 ccw(c2124.69,993.32) 2124.69,963 ; R8.1@2103.25,971.88 ccw(c2124.69,993.32) 2124.69,963 ; R8.1@2110.32,947.05 cw(c2148.83,908.54) 2148.83,963 ; R8.1@2110.32,947.05 cw(c2148.83,908.54) 2148.83,963 ; R8.1@2110.32,947.05 cw(c2148.83,908.54) 2148.83,963 ; R8.1@2110.32,947.05 cw(c2148.83,908.54) 2148.83,963 ; R8.1@2110.32,947.05 cw(c2148.83,908.54) 2148.83,963 ; R8.1@2110.32,978.95 ccw(c2148.83,1017.46) 2148.83,963 ; R8.1@2110.32,978.95 ccw(c2148.83,1017.46) 2148.83,963 ; R8.1@2110.32,978.95 ccw(c2148.83,1017.46) 2148.83,963 ; R8.1@2110.32,978.95 ccw(c2148.83,1017.46) 2148.83,963 ; R8.1@2110.32,978.95 ccw(c2148.83,1017.46) 2148.83,963 ; 2253.13,775.87 cw(c2211.26,734) P2.3@2270.47,734 ; 2253.13,775.87 ccw(c2295,817.74) P2.3@2295,758.53 ; 2253.13,775.87 cw(c2211.26,734) P2.3@2270.47,734 ; 2253.13,775.87 ccw(c2295,817.74) P2.3@2295,758.53 ; 2253.13,775.87 cw(c2211.26,734) P2.3@2270.47,734 ; 2253.13,775.87 ccw(c2295,817.74) P2.3@2295,758.53 ; 2253.13,775.87 cw(c2211.26,734) P2.3@2270.47,734 ; 2253.13,775.87 ccw(c2295,817.74) P2.3@2295,758.53 ; 2253.13,775.87 cw(c2211.26,734) P2.3@2270.47,734 ; 2253.13,775.87 ccw(c2295,817.74) P2.3@2295,758.53 ; 2264.48,756.35 ccw(c2301.61,766.3) P2.3@2293.9,728.64 ; 2264.48,756.35 ccw(c2301.61,766.3) P2.3@2293.9,728.64 ; 2264.48,756.35 ccw(c2301.61,766.3) P2.3@2293.9,728.64 ; 2264.48,756.35 ccw(c2301.61,766.3) P2.3@2293.9,728.64 ; 2264.48,756.35 ccw(c2301.61,766.3) P2.3@2293.9,728.64 ; 2264.48,756.35 ccw(c2301.61,766.3) P2.3@2293.9,728.64 ; 2264.48,756.35 ccw(c2301.61,766.3) P2.3@2293.9,728.64 ; 2264.48,756.35 ccw(c2301.61,766.3) P2.3@2293.9,728.64 ; 2264.48,756.35 ccw(c2301.61,766.3) P2.3@2293.9,728.64 ; 2264.48,756.35 ccw(c2301.61,766.3) P2.3@2293.9,728.64 ; 2270.2,758.8 cw(c2245.4,734) P2.3@2280.47,734 ; 2270.2,758.8 ccw(c2295,783.6) P2.3@2295,748.53 ; 2270.2,758.8 cw(c2245.4,734) P2.3@2280.47,734 ; 2270.2,758.8 ccw(c2295,783.6) P2.3@2295,748.53 ; 2270.2,758.8 cw(c2245.4,734) P2.3@2280.47,734 ; 2270.2,758.8 ccw(c2295,783.6) P2.3@2295,748.53 ; 2270.2,758.8 cw(c2245.4,734) P2.3@2280.47,734 ; 2270.2,758.8 ccw(c2295,783.6) P2.3@2295,748.53 ; 2270.2,758.8 cw(c2245.4,734) P2.3@2280.47,734 ; 2270.2,758.8 ccw(c2295,783.6) P2.3@2295,748.53 ; 2272.65,764.52 cw(c2262.7,727.39) P2.3@2300.36,735.1 ; 2272.65,764.52 cw(c2262.7,727.39) P2.3@2300.36,735.1 ; 2272.65,764.52 cw(c2262.7,727.39) P2.3@2300.36,735.1 ; 2272.65,764.52 cw(c2262.7,727.39) P2.3@2300.36,735.1 ; 2272.65,764.52 cw(c2262.7,727.39) P2.3@2300.36,735.1 ; 2272.65,764.52 cw(c2262.7,727.39) P2.3@2300.36,735.1 ; 2272.65,764.52 cw(c2262.7,727.39) P2.3@2300.36,735.1 ; 2272.65,764.52 cw(c2262.7,727.39) P2.3@2300.36,735.1 ; 2272.65,764.52 cw(c2262.7,727.39) P2.3@2300.36,735.1 ; 2272.65,764.52 cw(c2262.7,727.39) P2.3@2300.36,735.1
BOOT1: P2.4 R1.2 | length 1683.5
  Top Layer w10: P2.4@2295,834 2295,901 2359,965 R1.2@2478.63,965 ; P2.4@2277.66,851.34 ccw(c2235.79,893.21) 2295,893.21 ; P2.4@2277.66,851.34 ccw(c2235.79,893.21) 2295,893.21 ; P2.4@2277.66,851.34 ccw(c2235.79,893.21) 2295,893.21 ; P2.4@2277.66,851.34 ccw(c2235.79,893.21) 2295,893.21 ; P2.4@2277.66,851.34 ccw(c2235.79,893.21) 2295,893.21 ; P2.4@2284.73,844.27 ccw(c2259.93,869.07) 2295,869.07 ; P2.4@2284.73,844.27 ccw(c2259.93,869.07) 2295,869.07 ; P2.4@2284.73,844.27 ccw(c2259.93,869.07) 2295,869.07 ; P2.4@2284.73,844.27 ccw(c2259.93,869.07) 2295,869.07 ; P2.4@2284.73,844.27 ccw(c2259.93,869.07) 2295,869.07 ; 2295,869.07 ccw(c2330.07,869.07) P2.4@2305.27,844.27 ; 2295,869.07 ccw(c2330.07,869.07) P2.4@2305.27,844.27 ; 2295,869.07 ccw(c2330.07,869.07) P2.4@2305.27,844.27 ; 2295,869.07 ccw(c2330.07,869.07) P2.4@2305.27,844.27 ; 2295,869.07 ccw(c2330.07,869.07) P2.4@2305.27,844.27 ; 2295,893.21 ccw(c2354.22,893.21) P2.4@2312.34,851.34 ; 2295,893.21 ccw(c2354.22,893.21) P2.4@2312.34,851.34 ; 2295,893.21 ccw(c2354.22,893.21) P2.4@2312.34,851.34 ; 2295,893.21 ccw(c2354.22,893.21) P2.4@2312.34,851.34 ; 2295,893.21 ccw(c2354.22,893.21) P2.4@2312.34,851.34 ; 2424.17,965 cw(c2424.17,910.54) R1.2@2462.68,949.05 ; 2424.17,965 ccw(c2424.17,1019.46) R1.2@2462.68,980.95 ; 2424.17,965 cw(c2424.17,910.54) R1.2@2462.68,949.05 ; 2424.17,965 ccw(c2424.17,1019.46) R1.2@2462.68,980.95 ; 2424.17,965 cw(c2424.17,910.54) R1.2@2462.68,949.05 ; 2424.17,965 ccw(c2424.17,1019.46) R1.2@2462.68,980.95 ; 2424.17,965 cw(c2424.17,910.54) R1.2@2462.68,949.05 ; 2424.17,965 ccw(c2424.17,1019.46) R1.2@2462.68,980.95 ; 2424.17,965 cw(c2424.17,910.54) R1.2@2462.68,949.05 ; 2424.17,965 ccw(c2424.17,1019.46) R1.2@2462.68,980.95 ; 2448.31,965 cw(c2448.31,934.68) R1.2@2469.75,956.12 ; 2448.31,965 ccw(c2448.31,995.32) R1.2@2469.75,973.88 ; 2448.31,965 cw(c2448.31,934.68) R1.2@2469.75,956.12 ; 2448.31,965 ccw(c2448.31,995.32) R1.2@2469.75,973.88 ; 2448.31,965 cw(c2448.31,934.68) R1.2@2469.75,956.12 ; 2448.31,965 ccw(c2448.31,995.32) R1.2@2469.75,973.88 ; 2448.31,965 cw(c2448.31,934.68) R1.2@2469.75,956.12 ; 2448.31,965 ccw(c2448.31,995.32) R1.2@2469.75,973.88 ; 2448.31,965 cw(c2448.31,934.68) R1.2@2469.75,956.12 ; 2448.31,965 ccw(c2448.31,995.32) R1.2@2469.75,973.88
CLEAR_LED: R9.1 SW1.1 SW1.2 U1.43 | length 3642.4
  Top Layer w10: SW1.2@1803,928.78 SW1.1@1803,1165 1801.37,1166.63 R9.1@1801.37,1368 1916,1482.63 1916,1839.63 1963.75,1887.38 2087.77,1887.38 U1.43@2090.55,1890.16 ; R9.1@1785.42,1350.08 cw(c1746.91,1311.57) 1801.37,1311.57 ; R9.1@1785.42,1350.08 cw(c1746.91,1311.57) 1801.37,1311.57 ; R9.1@1785.42,1350.08 cw(c1746.91,1311.57) 1801.37,1311.57 ; R9.1@1785.42,1350.08 cw(c1746.91,1311.57) 1801.37,1311.57 ; R9.1@1785.42,1350.08 cw(c1746.91,1311.57) 1801.37,1311.57 ; R9.1@1792.49,1357.15 cw(c1771.05,1335.71) 1801.37,1335.71 ; R9.1@1792.49,1357.15 cw(c1771.05,1335.71) 1801.37,1335.71 ; R9.1@1792.49,1357.15 cw(c1771.05,1335.71) 1801.37,1335.71 ; R9.1@1792.49,1357.15 cw(c1771.05,1335.71) 1801.37,1335.71 ; R9.1@1792.49,1357.15 cw(c1771.05,1335.71) 1801.37,1335.71 ; R9.1@1794.13,1371.68 cw(c1827.91,1363.7) R9.1@1818.93,1397.23 ; R9.1@1794.13,1371.68 cw(c1827.91,1363.7) R9.1@1818.93,1397.23 ; R9.1@1794.13,1371.68 cw(c1827.91,1363.7) R9.1@1818.93,1397.23 ; R9.1@1794.13,1371.68 cw(c1827.91,1363.7) R9.1@1818.93,1397.23 ; R9.1@1794.13,1371.68 cw(c1827.91,1363.7) R9.1@1818.93,1397.23 ; R9.1@1794.13,1371.68 cw(c1827.91,1363.7) R9.1@1818.93,1397.23 ; R9.1@1794.13,1371.68 cw(c1827.91,1363.7) R9.1@1818.93,1397.23 ; R9.1@1794.13,1371.68 cw(c1827.91,1363.7) R9.1@1818.93,1397.23 ; R9.1@1794.13,1371.68 cw(c1827.91,1363.7) R9.1@1818.93,1397.23 ; R9.1@1794.13,1371.68 cw(c1827.91,1363.7) R9.1@1818.93,1397.23 ; 1801.37,1311.57 cw(c1855.83,1311.57) R9.1@1817.32,1350.08 ; 1801.37,1311.57 cw(c1855.83,1311.57) R9.1@1817.32,1350.08 ; 1801.37,1311.57 cw(c1855.83,1311.57) R9.1@1817.32,1350.08 ; 1801.37,1311.57 cw(c1855.83,1311.57) R9.1@1817.32,1350.08 ; 1801.37,1311.57 cw(c1855.83,1311.57) R9.1@1817.32,1350.08 ; 1801.37,1335.71 cw(c1831.69,1335.71) R9.1@1810.25,1357.15 ; 1801.37,1335.71 cw(c1831.69,1335.71) R9.1@1810.25,1357.15 ; 1801.37,1335.71 cw(c1831.69,1335.71) R9.1@1810.25,1357.15 ; 1801.37,1335.71 cw(c1831.69,1335.71) R9.1@1810.25,1357.15 ; 1801.37,1335.71 cw(c1831.69,1335.71) R9.1@1810.25,1357.15 ; R9.1@1801.37,1382.53 ccw(c1801.37,1417.6) R9.1@1826.17,1392.8 ; R9.1@1801.37,1382.53 ccw(c1801.37,1417.6) R9.1@1826.17,1392.8 ; R9.1@1801.37,1382.53 ccw(c1801.37,1417.6) R9.1@1826.17,1392.8 ; R9.1@1801.37,1382.53 ccw(c1801.37,1417.6) R9.1@1826.17,1392.8 ; R9.1@1801.37,1382.53 ccw(c1801.37,1417.6) R9.1@1826.17,1392.8 ; R9.1@1801.37,1392.53 ccw(c1801.37,1451.74) 1843.24,1409.87 ; R9.1@1801.37,1392.53 ccw(c1801.37,1451.74) 1843.24,1409.87 ; R9.1@1801.37,1392.53 ccw(c1801.37,1451.74) 1843.24,1409.87 ; R9.1@1801.37,1392.53 ccw(c1801.37,1451.74) 1843.24,1409.87 ; R9.1@1801.37,1392.53 ccw(c1801.37,1451.74) 1843.24,1409.87 ; R9.1@1802.63,1362.64 ccw(c1797.18,1394.31) R9.1@1828.22,1385.99 ; R9.1@1802.63,1362.64 ccw(c1797.18,1394.31) R9.1@1828.22,1385.99 ; R9.1@1802.63,1362.64 ccw(c1797.18,1394.31) R9.1@1828.22,1385.99 ; R9.1@1802.63,1362.64 ccw(c1797.18,1394.31) R9.1@1828.22,1385.99 ; R9.1@1802.63,1362.64 ccw(c1797.18,1394.31) R9.1@1828.22,1385.99 ; R9.1@1802.63,1362.64 ccw(c1797.18,1394.31) R9.1@1828.22,1385.99 ; R9.1@1802.63,1362.64 ccw(c1797.18,1394.31) R9.1@1828.22,1385.99 ; R9.1@1802.63,1362.64 ccw(c1797.18,1394.31) R9.1@1828.22,1385.99 ; R9.1@1802.63,1362.64 ccw(c1797.18,1394.31) R9.1@1828.22,1385.99 ; R9.1@1802.63,1362.64 ccw(c1797.18,1394.31) R9.1@1828.22,1385.99 ; R9.1@1803.86,1369.38 cw(c1846.41,1359.33) 1835.1,1401.56 ; R9.1@1803.86,1369.38 cw(c1846.41,1359.33) 1835.1,1401.56 ; R9.1@1803.86,1369.38 cw(c1846.41,1359.33) 1835.1,1401.56 ; R9.1@1803.86,1369.38 cw(c1846.41,1359.33) 1835.1,1401.56 ; R9.1@1803.86,1369.38 cw(c1846.41,1359.33) 1835.1,1401.56 ; R9.1@1803.86,1369.38 cw(c1846.41,1359.33) 1835.1,1401.56 ; R9.1@1803.86,1369.38 cw(c1846.41,1359.33) 1835.1,1401.56 ; R9.1@1803.86,1369.38 cw(c1846.41,1359.33) 1835.1,1401.56 ; R9.1@1803.86,1369.38 cw(c1846.41,1359.33) 1835.1,1401.56 ; R9.1@1803.86,1369.38 cw(c1846.41,1359.33) 1835.1,1401.56 ; R9.1@1823.93,1369.97 cw(c1873.64,1369.97) 1838.49,1405.12 ; R9.1@1823.93,1369.97 cw(c1873.64,1369.97) 1838.49,1405.12 ; R9.1@1823.93,1369.97 cw(c1873.64,1369.97) 1838.49,1405.12 ; R9.1@1823.93,1369.97 cw(c1873.64,1369.97) 1838.49,1405.12 ; R9.1@1823.93,1369.97 cw(c1873.64,1369.97) 1838.49,1405.12 ; 2052.13,1887.38 ccw(c2052.13,1899.06) U1.43@2060.38,1890.8 ; 2052.13,1887.38 ccw(c2052.13,1899.06) U1.43@2060.38,1890.8 ; 2052.13,1887.38 ccw(c2052.13,1899.06) U1.43@2060.38,1890.8 ; 2052.13,1887.38 ccw(c2052.13,1899.06) U1.43@2060.38,1890.8 ; 2052.13,1887.38 ccw(c2052.13,1899.06) U1.43@2060.38,1890.8